# Altium PCB LNA_RF.PcbDoc
Units mm, origin at the board's own origin, x right, y up, seen from the top; angles counter-clockwise.
Board outline 13.4 x 13.4 mm, 4 copper layers (Top Layer, Layer 1, Layer 2, Bottom Layer 1), stack 0.775 mm thick; 8 components, 6 nets, 32 pads, 52 vias.
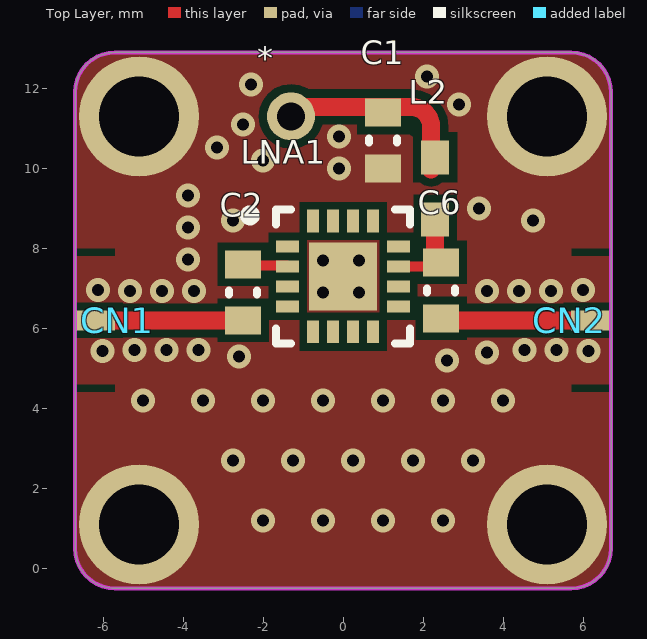
[diagram p0: Top Layer view]
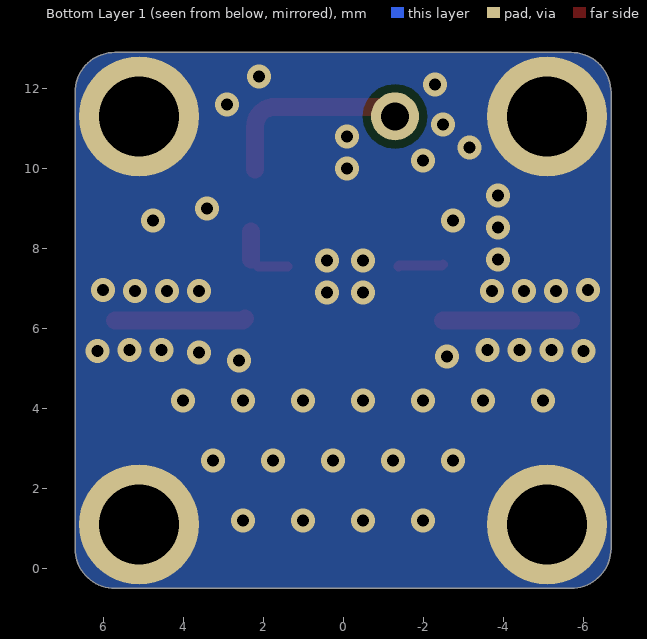
[diagram p1: Bottom Layer 1 view, seen from below]
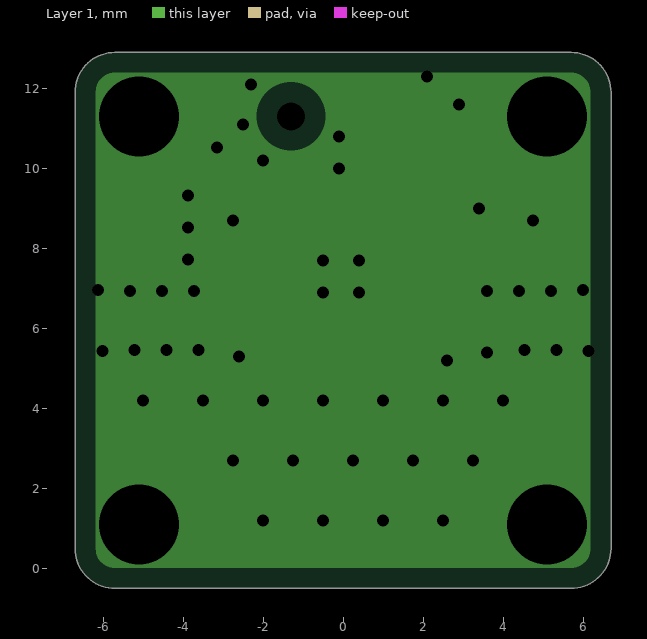
[diagram p2: Layer 1, clearances drawn from the general rule]
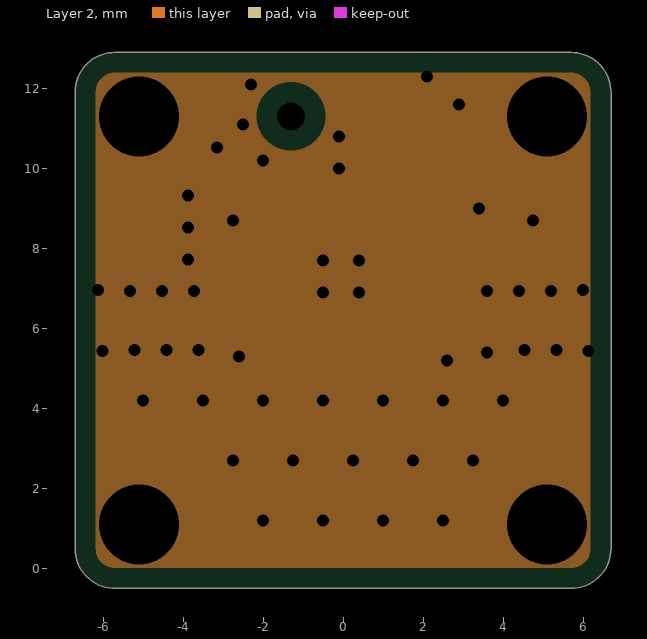
[diagram p3: Layer 2, clearances drawn from the general rule]

## Layer stack, top to bottom
Top Solder: solder mask 0.0102, Solder Resist, Dk 3.5
Top Layer: signal copper 0.035
Dielectric 2: prepreg 0.254, PP-006, Dk 4.1
Layer 1: plane copper 0.035, net GND
Dielectric 1: dielectric 0.127, FR-4, Dk 4.8
Layer 2: plane copper 0.035, net GND
Dielectric 3: prepreg 0.254, PP-006, Dk 4.1
Bottom Layer 1: signal copper 0.035
Bottom Solder: solder mask 0.0102, Solder Resist, Dk 3.5

## Board outline
-6.7,0.5 -6.7,11.9 cw(c-5.7,11.9) -5.7,12.9 5.7,12.9 cw(c5.7,11.9) 6.7,11.9 6.7,0.5 cw(c5.7,0.5) 5.7,-0.5 -5.7,-0.5 cw(c-5.7,0.5)

## Design rules (kind name [scope] priority, off if disabled: settings)
Clearance [All] p1: gap=0.2 ignorepadtopadclearanceinfootprint=FALSE
HoleSize [All] p1: absolutevalues=TRUE maxlimit=5 minlimit=0.3 maxpercent=80.000 minpercent=20.000
PlaneClearance [All] p1: clearance=0.508
PlaneConnect [All] p1: planeconnectstyle=Direct reliefexpansion=0.508 reliefentries=4 reliefconductorwidth=0.254 reliefairgap=0.254
PolygonConnect [All] p1: connectstyle=Direct reliefconductorwidth=0.254 reliefentries=4 polygonreliefangle="90 Angle" airgapwidth=0.254
RoutingVias [All] p1: holewidth=0.711 width=1.27 viastyle="Through Hole" minholewidth=0.711 minwidth=1.27 maxholewidth=0.711 maxwidth=1.27 useviatemplates=TRUE viatemplateguid#1={0EDDF682-0F6D-4B5C-8D88-A910B1B14BEF} viatemplatename#1=v60h30m0mx0
SolderMaskExpansion [All] p1: expansion=0.102
Width Width_50ohm [InNetClass('50ohm')] p1: maxlimit=0.45 minlimit=0.45 preferedwidth=0.45 impedanceprofiledriven=TRUE impedanceprofileid={D2B77361-9B7D-4BD5-B69E-70E315500705} impedanceprofilevalue=50.000000 minimp=50.000000 maximp=50.000000 favimp=50.000000 checkconnectedcopper=TRUE
Width [All] p2: maxlimit=5 minlimit=0.2 preferedwidth=0.2
27 further rules are at their usual default settings.

## Classes and differential pairs
net class 50ohm: NetC6_2

## Components (designator, comment, footprint, x,y, rotation, side; value= is the part's Value field where it differs from the comment)
* "TEST_VIA_RF" "New footprint 1" -1.3,11.3 r0 top
C1 "100nF" CAPC0603(1608)55_L 1,10.7 r270 top
C2 "4.7nF" CAPC0603(1608)55_L -2.5,6.9 r90 top value=4.7n
C6 "4.7nF" CAPC0603(1608)55_L 2.45,6.95 r270 top value=4.7n
CN1 "X-CONNECTOR" X-CONNECTOR-PCB -5.1,11.3 r0 top
CN2 "X-CONNECTOR" X-CONNECTOR-PCB 5.1,1.1 r180 top
L2 "0.33uH" 0603-IND 2.3,9.5 r90 top
LNA1 "TQP3M9019" QFN50P300X300X90_HS-17N 0,7.3 r0 top

## Footprints (in the part's own frame and the unit in brackets; to place one, negate y for a bottom-side part, rotate by r counter-clockwise, add the part's x,y. Pads: shape width x height; smd on the part's side, far side on the other; paste and mask are expansions set on the pad)
0603-IND [mm] "Chip Inductor, 2-Leads, Body 1.6x0.8mm"
  rect 0.85x0.7 smd: 1(-0.775,0) 2(0.775,0)
  body extent -0.8,-0.4 0.8,0.4, height 0.79
CAPC0603(1608)55_L [mm] "Chip Capacitor, Body 1.6x0.8mm, Height 0.55mm, IPC High Density"
  rect 0.7x0.9 smd: 1(-0.7,0) 2(0.7,0)
  silkscreen extent -0.05,-0.35 0.05,0.35, body extent -0.87,-0.47 0.88,0.48, height 0.55
"New footprint 1" [mm]
  round 1.2 hole 0.7: 1(0,0)
QFN50P300X300X90_HS-17N [mm] "QFN, 16-Leads, Body 3,00x3,00mm, Pitch 0,50mm, Thermal Pad 1,70x1,70mm, IPC Medium Density"
  rect 0.57x0.3 smd: 1(-1.385,0.75) 2(-1.385,0.25) 3(-1.385,-0.25) 4(-1.385,-0.75) 9(1.385,-0.75) 10(1.385,-0.25) 11(1.385,0.25) 12(1.385,0.75)
  rect 0.3x0.57 smd: 5(-0.75,-1.385) 6(-0.25,-1.385) 7(0.25,-1.385) 8(0.75,-1.385) 13(0.75,1.385) 14(0.25,1.385) 15(-0.25,1.385) 16(-0.75,1.385)
  rect 1.7x1.7 smd: 17(0,0)
  silkscreen extent -2.45,-1.67 1.67,1.68, body extent -1.53,-1.52 1.52,1.53, height 0.9
X-CONNECTOR-PCB [mm]
  rect 1x0.5 smd: 1(-1.1,-5.1)
  round 3 hole 2: M1(0,0) M2(0,-10.2)
  Top Layer pour cut-out: -1.616,-3.576
  Top Layer pour cut-out: -1.6,-3.5 -0.6,-3.5 -0.6,-3.3 -1.6,-3.3
  Top Layer pour cut-out: -0.6,-6.7 -1.6,-6.7 -1.6,-6.9 -0.6,-6.9

## Part data
*: library part TEST_VIA_RF-01.A.1, "Test VIA for RF circuits"
C1: library part CC0603-100nF-1, "CAP CER 0.1UF 50V X7R 0603", Part No=GRM188R71H104KA93D
C2 C6: library part CC0603-4.7nF-6, "CAP CER 4700PF 50V 20% X7R 0603", Part No=GRM188R71H472MA01D, Cod EMS=05.281.019.494
CN1 CN2: library part X-CONNECTOR-5, "CONECTOR PARA MÓDULOS X MICROWAVE", Mount=TH, RoHS=Yes
L2: library part 0603LS-331XJLB-3, "Fixed Inductors RF Chip Inductor 0.33 uH 5 % 0.56 A", Part No=0603LS-331XJLB, Cod EMS=05.286.035.181, Family=0603LS-...XJLB, Family Description="INDUTORES FIXOS RF CHIP 47nH-22uH / 5% / SMD. P/N: 0603LS-...XJLB - COILCRAFT."
LNA1: library part TQP3M9019-01.A.1, "RF Amplifier .05-4GHz P1dB= 22dB Gain 26.4dB 5Volts", Case/Package=QFN, Frequency=20MHz, Max Operating Temperature=85°C, Max Supply Voltage=5.25V, Min Operating Temperature=-40°C, Min Supply Voltage=4.75V, Operating Supply Current=125mA, Operating Supply Voltage=5V, Package Quantity=2500, Test Frequency=1.9GHz, Gain=22dB, Mount="Surface Mount", Number of Channels=1, Number of Pins=16, Packaging="Tape and Reel", Radiation Hardening=No, Weight=0.002014oz

## Via types
v1: diameter 0.6, hole 0.3, Top Layer to Bottom Layer 1, tented both sides, 33 vias
v2: diameter 0.6, hole 0.3, Top Layer to Bottom Layer 1, 19 vias

## Nets (pads, with @x,y where several pads share a name; then routed paths per layer and width w, separated by ;. In a path a pad name is that pad's centre, name@x,y a point inside that pad or via, vN(x,y) a via of type N, cw(c..) or ccw(c..) an arc to the next point about the centre after c; other vN are vias at no path point)
GND: C1.2 CN1.M1 CN1.M2 CN2.M1 CN2.M2 LNA1.17
  other v1: 2.6,5.2 -2.6,5.3 3.6,5.4 -6.007,5.44 6.135,5.44 -5.207,5.461 -4.407,5.461 -3.607,5.461 4.535,5.461 5.335,5.461 -0.5,6.9 0.4,6.9 -5.328,6.939 -4.528,6.939 -3.728,6.939 3.599,6.939 4.399,6.939 5.199,6.939 -6.128,6.96 5.999,6.96 -0.5,7.7 0.4,7.7 -3.875,7.726 -3.875,8.526 3.4,9 -3.875,9.326 -0.1,10 -3.156,10.52 -0.1,10.8 -2.5,11.1 2.9,11.6 -2.3,12.1 2.1,12.3
  other v2: -2,1.2 -0.5,1.2 1,1.2 2.5,1.2 -2.75,2.7 -1.25,2.7 0.25,2.7 1.75,2.7 3.25,2.7 -5,4.2 -3.5,4.2 -2,4.2 -0.5,4.2 1,4.2 2.5,4.2 4,4.2 -2.75,8.7 4.75,8.7 -2,10.2
Net*_1: *.1 C1.1 L2.2 | length 4.9
  Top Layer w0.45: *.1@-1.3,11.54 1,11.54 1.7,11.54 cw(c1.7,11.04) 2.2,11.04 L2.2@2.2,9.975
NetC2_1: C2.1 CN1.1 | length 3.2
  Top Layer w0.45: -5.7,6.2 C2.1
NetC2_2: C2.2 LNA1.2 | length 1.1
  Top Layer w0.255: C2.2 -2.473,7.573 -1.408,7.573 LNA1.2
NetC6_1: C6.1 L2.1 LNA1.11 | length 1.7
  Top Layer w0.255: LNA1.11 2.125,7.55 C6.1@2.3,7.725
  Top Layer w0.45: C6.1@2.3,7.725 L2.1@2.3,8.425
NetC6_2: C6.2 CN2.1 | length 3.3
  Top Layer w0.45: C6.2 2.5,6.2 5.7,6.2
pads on no net: LNA1.1 LNA1.3 LNA1.4 LNA1.5 LNA1.6 LNA1.7 LNA1.8 LNA1.9 LNA1.10 LNA1.12 LNA1.13 LNA1.14 LNA1.15 LNA1.16

## Polygon pours and split planes (outlines as drawn)
GND on Bottom Layer 1 "Bottom Layer 1-GND" (solid, pour order 3): -5.7,-0.5 cw(c-5.7,0.5) -6.7,0.5 -6.7,11.9 cw(c-5.7,11.9) -5.7,12.9 5.7,12.9 cw(c5.7,11.9) 6.7,11.9 6.7,0.5 cw(c5.7,0.5) 5.7,-0.5
GND on Top Layer "Top Layer-GND" (solid, pour order 5): -5.7,-0.5 cw(c-5.7,0.5) -6.7,0.5 -6.7,11.9 cw(c-5.7,11.9) -5.7,12.9 5.7,12.9 cw(c5.7,11.9) 6.7,11.9 6.7,0.5 cw(c5.7,0.5) 5.7,-0.5
GND on Layer 1 (split plane): 5.796,12.382 5.888,12.354 5.973,12.309 6.048,12.248 6.109,12.173 6.154,12.088 6.182,11.996 6.191,11.912 6.19,11.9 6.19,0.5 6.191,0.488 6.182,0.404 6.154,0.312 6.109,0.227 6.048,0.152 5.973,0.091 5.888,0.046 5.796,0.018 5.712,0.009 5.7,0.01 -5.7,0.01 -5.712,0.009 -5.796,0.018 -5.888,0.046 -5.973,0.091 -6.048,0.152 -6.109,0.227 -6.154,0.312 -6.182,0.404 -6.191,0.488 -6.19,0.5 -6.19,11.9 -6.191,11.912 -6.182,11.996 -6.154,12.088 -6.109,12.173 -6.048,12.248 -5.973,12.309 -5.888,12.354 -5.796,12.382 -5.712,12.391 -5.7,12.39 5.7,12.39 5.712,12.391
GND on Layer 2 (split plane): 5.796,12.382 5.888,12.354 5.973,12.309 6.048,12.248 6.109,12.173 6.154,12.088 6.182,11.996 6.191,11.912 6.19,11.9 6.19,0.5 6.191,0.488 6.182,0.404 6.154,0.312 6.109,0.227 6.048,0.152 5.973,0.091 5.888,0.046 5.796,0.018 5.712,0.009 5.7,0.01 -5.7,0.01 -5.712,0.009 -5.796,0.018 -5.888,0.046 -5.973,0.091 -6.048,0.152 -6.109,0.227 -6.154,0.312 -6.182,0.404 -6.191,0.488 -6.19,0.5 -6.19,11.9 -6.191,11.912 -6.182,11.996 -6.154,12.088 -6.109,12.173 -6.048,12.248 -5.973,12.309 -5.888,12.354 -5.796,12.382 -5.712,12.391 -5.7,12.39 5.7,12.39 5.712,12.391

## Keep-outs
Top Layer:
  the board outline again, w0.1

## Silkscreen, mask and mechanical layers (free items; w line width, h text height)
Mechanical 1:
  the board outline again, w0.2